# Altium PCB Alarm_Clock_Layout_final.pcbdoc
Units mm, origin at the board's own origin, x right, y up, seen from the top; angles counter-clockwise.
Board outline 100 x 75 mm, 2 copper layers (Top Layer, Bottom Layer), stack 1.071 mm thick; 34 components, 39 nets, 124 pads, 14 vias.
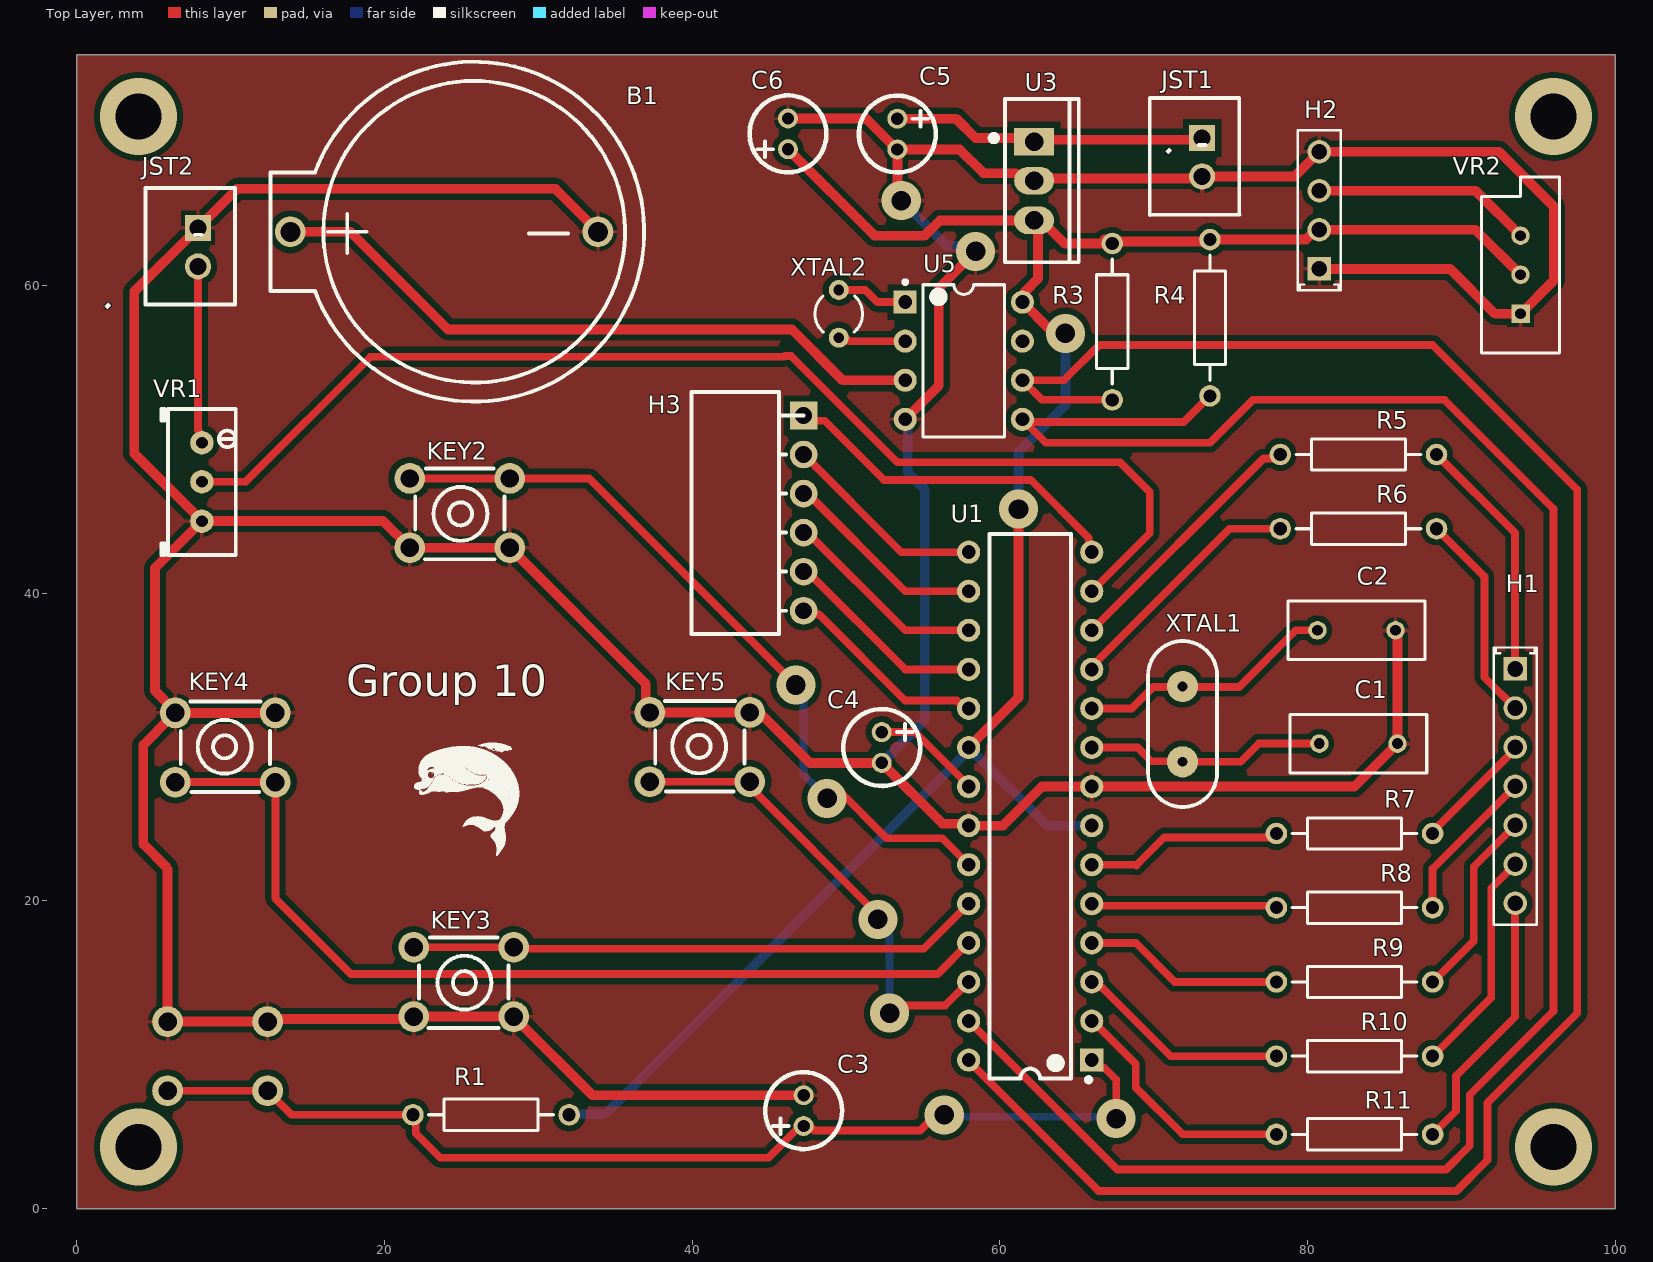
[diagram p0: Top Layer view]
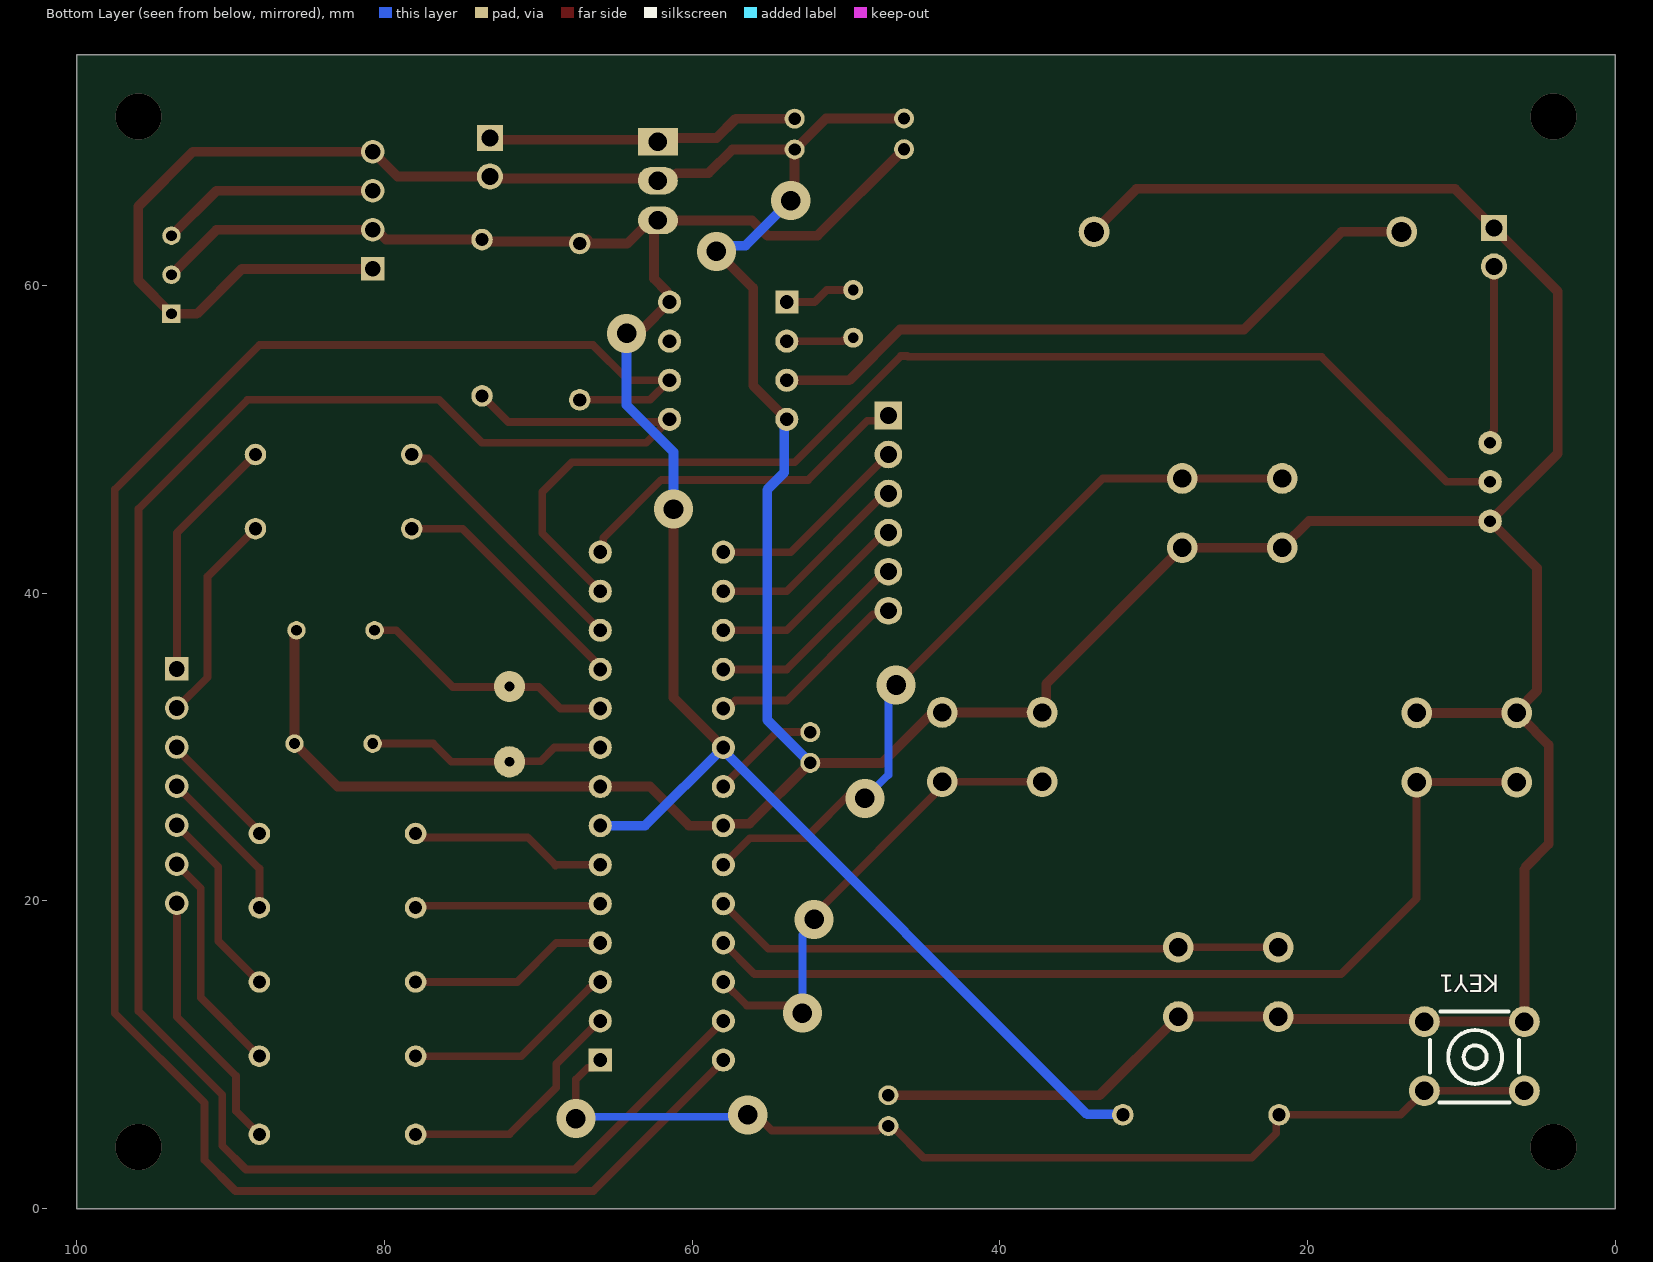
[diagram p1: Bottom Layer view, seen from below]

## Layer stack, top to bottom
Top Solder: solder mask 0.0102, Solder Resist, Dk 3.5
Top Layer: signal copper 0.0356
Dielectric1: dielectric 1, FR-4, Dk 4.8
Bottom Layer: signal copper 0.0356
Bottom Solder: solder mask 0.0102, Solder Resist, Dk 3.5

## Board outline
100,0 0,0 0,75 100,75

## Design rules (kind name [scope] priority, off if disabled: settings)
Clearance [All] p1: gap=0.381 ignorepadtopadclearanceinfootprint=FALSE except(0.254: Arc-THPad Track-THPad SMDPad-THPad THPad-THPad)
ComponentClearance [All] p1 off: gap=0.254 collisioncheckmode=3 verticalgap=0.254 showdistances=FALSE
Height [All] p1: minheight=0 maxheight=30 prefheight=12.7
HoleSize [All] p1: absolutevalues=TRUE maxlimit=10.16 minlimit=0.025 maxpercent=80.000 minpercent=20.000
MinimumSolderMaskSliver [All] p1 off: minsoldermaskwidth=0.127
PolygonConnect [All] p1: connectstyle=Relief reliefconductorwidth=0.254 reliefentries=4 polygonreliefangle="90 Angle" airgapwidth=0.254
RoutingVias [All] p1: holewidth=1.27 width=2.54 viastyle="Through Hole" minholewidth=0.711 minwidth=1.27 maxholewidth=3.81 maxwidth=5.08
SilkToSolderMaskClearance [IsPad] p1 off: minsilkscreentomaskgap=0.254 clearancetoexposedcopper=TRUE
SolderMaskExpansion [All] p1: expansion=0.102 istentingtop=FALSE
Width Width_1 [InNet('+5V') or InNet('GND') or InNet('VCC')] p1: maxlimit=0.762 minlimit=0.635 preferedwidth=0.635 minimp=50.000000 maximp=50.000000 favimp=50.000000
Width [All] p2: maxlimit=0.635 minlimit=0.508 preferedwidth=0.508 minimp=50.000000 maximp=50.000000 favimp=50.000000
25 further rules are at their usual default settings.

## Components (designator, comment, footprint, x,y, rotation, side; value= is the part's Value field where it differs from the comment)
B1 "CR2032 3V" BAT-TH_BS-2-1 23.876,63.5 r90 top
C1 "22pF" RAD-0.2 83.312,30.226 r180 top value=100nF
C2 "22pF" RAD-0.2 83.185,37.592 r180 top value=100nF
C3 "100nF" CAP-TH_BD5.0-P2.00-D0.8-FD 47.244,6.366 r90 top
C4 "100nF" CAP-TH_BD5.0-P2.00-D0.8-FD 52.324,29.972 r270 top
C5 "100nF" CAP-TH_BD5.0-P2.00-D0.8-FD 53.34,69.85 r270 top
C6 "100nF" CAP-TH_BD5.0-P2.00-D0.8-FD 46.228,69.866 r90 top
H1 "KEYPAD" CON7_1X7_P100UM_HDR_TYC 93.5,35.08 r270 top
H2 "LCD_1602" CON4_1X4_P100UM_HDR2_TYC 80.772,61.087 r90 top
H3 "LCD_1602" HDR-TH_6P-P2.54-H-F-W5.7 47.244,45.212 r270 top
JST1 "JST_2 PIN" CONN-TH_XHB-2A 73.152,68.345 r90 top
JST2 "JST_2 PIN" CONN-TH_XHB-2A 7.874,62.503 r90 top
KEY1 "Push_Button" KEY-TH_4P-L6.0-W6.0-P4.50 9.144,9.906 r0 bottom
KEY2 "Push_Button" KEY-TH_4P-L6.0-W6.0-P4.50 24.892,45.212 r180 top
KEY3 "Push_Button" KEY-TH_4P-L6.0-W6.0-P4.50 25.146,14.732 r180 top
KEY4 "Push_Button" KEY-TH_4P-L6.0-W6.0-P4.50 9.652,29.972 r0 top
KEY5 "Push_Button" KEY-TH_4P-L6.0-W6.0-P4.50 40.5,30 r0 top
R1 "RESISTOR" AXIAL-0.4 26.924,6.096 r0 top value=Value
R3 "10k" AXIAL-0.4 67.31,57.658 r90 top value=Value
R4 "10k" AXIAL-0.4 73.66,57.912 r90 top value=Value
R5 "100R" AXIAL-0.4 83.312,49.022 r0 top value=Value
R6 "100R" AXIAL-0.4 83.312,44.196 r0 top value=Value
R7 "100R" AXIAL-0.4 83.058,24.384 r0 top value=Value
R8 "100R" AXIAL-0.4 83.058,19.558 r0 top value=Value
R9 "100R" AXIAL-0.4 83.058,14.732 r0 top value=Value
R10 "100R" AXIAL-0.4 83.058,9.906 r0 top value=Value
R11 "100R" AXIAL-0.4 83.058,4.826 r0 top value=Value
U1 "ATMEGA _328P-PU" DIP-28_L34.6-W7.3-P2.54-LS10.2-BL 61.976,26.162 r90 top
U3 "7805_Regulator" TO-220-3_L10.0-W4.5-P2.54-L 62.23,66.802 r270 top
U5 "DS1307" DIP-8_L9.8-W6.6-P2.54-LS7.6-BL 57.658,55.118 r270 top
VR1 "1k" RES-ADJ-TH_3296W 8.128,47.234 r0 top
VR2 "Potentiometer" VR5 93.853,60.706 r90 top value=1K
XTAL1 "16MHz" "16MHZ_OSC [PCB]" 71.882,31.496 r180 top
XTAL2 "32.768KHz" R38 49.53,58.166 r0 top

## Footprints (in the part's own frame and the unit in brackets; to place one, negate y for a bottom-side part, rotate by r counter-clockwise, add the part's x,y. Pads: shape width x height; smd on the part's side, far side on the other; paste and mask are expansions set on the pad)
"16MHZ_OSC [PCB]" [mil]
  round 80 hole 25: 1(0,96.46) 2(0,-96.46)
  silkscreen extent -89,-212 89,212
AXIAL-0.4 [mm] "Axial Device, Thru-Hole; 2 Leads; 0.4 in Pin Spacing"
  round 1.4 hole 0.85: 1(-5.08,0) 2(5.08,0)
  silkscreen extent -4.06,-1.02 4.06,1.02
BAT-TH_BS-2-1 [mm]
  round 2 hole 1.3: 1(0,10) 2(0,-10)
  silkscreen extent -11.04,-13 11.05,11.3
CAP-TH_BD5.0-P2.00-D0.8-FD [mm]
  round 1.3 hole 0.8: 1(-1,0) 2(1,0)
  silkscreen extent -2.5,-2.5 2.5,2.5
CON4_1X4_P100UM_HDR2_TYC [mil]
  rect 60x60 hole 40 mask+0: 1(0,0)
  round 60 hole 40 mask+0: 2(100,0) 3(200,0) 4(300,0)
  silkscreen extent -55,-55 355,55, body extent 0,0 10,10, height 10
CON7_1X7_P100UM_HDR_TYC [mil]
  rect 60x60 hole 40 mask+0: 1(0,0)
  round 60 hole 40 mask+0: 2(100,0) 3(200,0) 4(300,0) 5(400,0) 6(500,0) 7(600,0)
  silkscreen extent -55,-55 655,55, body extent 0,0 10,10, height 10
CONN-TH_XHB-2A [mm]
  rect 1.7x1.7 hole 1.1: 1(1.251,0)
  round 1.7 hole 1.1: 2(-1.251,0)
  silkscreen extent -3.75,-2.42 3.86,3.4
DIP-8_L9.8-W6.6-P2.54-LS7.6-BL [mm]
  rect 1.5x1.5 hole 0.9: 1(-3.81,-3.81)
  round 1.5 hole 0.9: 2(-1.27,-3.81) 3(1.27,-3.81) 4(3.81,-3.81) 5(3.81,3.81) 6(1.27,3.81) 7(-1.27,3.81) 8(-3.81,3.81)
  silkscreen extent -5.23,-3.93 4.96,2.65
DIP-28_L34.6-W7.3-P2.54-LS10.2-BL [mm]
  rect 1.5x1.5 hole 0.9: 1(-16.51,-4)
  round 1.5 hole 0.9: 2(-13.97,-4) 3(-11.43,-4) 4(-8.89,-4) 5(-6.35,-4) 6(-3.81,-4) 7(-1.27,-4) 8(1.27,-4) 9(3.81,-4) 10(6.35,-4) 11(8.89,-4) 12(11.43,-4) 13(13.97,-4) 14(16.51,-4) 15(16.51,4) 16(13.97,4) 17(11.43,4) 18(8.89,4) 19(6.35,4) 20(3.81,4) 21(1.27,4) 22(-1.27,4) 23(-3.81,4) 24(-6.35,4) 25(-8.89,4) 26(-11.43,4) 27(-13.97,4) 28(-16.51,4)
  silkscreen extent -17.94,-3.95 17.7,2.65
HDR-TH_6P-P2.54-H-F-W5.7 [mm]
  rect 1.8x1.8 hole 1.1: 1(-6.35,0)
  round 1.8 hole 1.1: 2(-3.81,0) 3(-1.27,0) 4(1.27,0) 5(3.81,0) 6(6.35,0)
  silkscreen extent -7.87,-7.3 7.87,0
KEY-TH_4P-L6.0-W6.0-P4.50 [mm]
  round 2 hole 1.2: 1(-3.25,-2.25) 2(3.25,-2.25) 3(3.25,2.25) 4(-3.25,2.25)
  silkscreen extent -2.9,-2.9 2.9,3
R38 [mm] "Crystal, Thru-Hole; 2 Leads; Body 3.1 x 8.2 mm (Dia.xH)"
  round 1.3 hole 0.7: 1(0,1.55) 2(0,-1.55)
  silkscreen extent -1.55,-1.19 1.55,1.17
RAD-0.2 [mm] "Radial Cap, Thru-Hole; 2 Leads; 0.2 in Pin Spacing"
  round 1.2 hole 0.7: 1(-2.54,0) 2(2.54,0)
  silkscreen extent -4.44,-1.91 4.44,1.91
RES-ADJ-TH_3296W [mil]
  round 60 hole 30: 1(0,100.39) 2(0,0.39) 3(0,-100.4)
  silkscreen extent -104,-187 87,187
TO-220-3_L10.0-W4.5-P2.54-L [mm]
  rect 1.8x2.6 hole 1.2: 1(-2.56,0.005)
  oval 1.8x2.6 hole 1.2: 2(-0.02,0.005) 3(2.56,-0.005)
  silkscreen extent -5.32,-2.82 5.28,2.9
VR5 [mm] "Thru-Hole; 3 Leads"
  rect 1.2x1.2 hole 0.7: 1(-2.54,0)
  round 1.2 hole 0.7: 2(0,0) 3(2.54,0)
  silkscreen extent -5.08,-2.54 6.35,2.54

## Part data
B1: BOM_JLCPCB Part Class="Extended Part", BOM_Manufacturer=Q&J, BOM_Manufacturer Part=BS-2-1, BOM_Supplier=LCSC, BOM_Supplier Part=C70376, spicePre=B, spiceSymbolName=CR2032-BS-2-1
C1 C2: library part 100nF, BOM_Manufacturer=LCSC, BOM_Manufacturer Part="0.1UF(104) +-20% 63v", BOM_Supplier=LCSC, BOM_Supplier Part=C19355, spicePre=C, spiceSymbolName=100nF
C3 C4 C5 C6: BOM_JLCPCB Part Class="Extended Part", BOM_Manufacturer=ValuePro, BOM_Manufacturer Part="0.1UF 50V", BOM_Supplier=LCSC, BOM_Supplier Part=C28061, nameAlias=Capacitance, spicePre=C, spiceSymbolName=0.1uF
H1: library part 826926-7, "No Description Available", Mfr_Name="TE Connectivity", Copyright="Copyright (C) 2021 Ultra Librarian. All rights reserved.", Manufacturer_Part_Number=826926-7, RefDes=RefDes, Type=DEV
H2: library part 826936-4, "No Description Available", Mfr_Name="TE Connectivity", Copyright="Copyright (C) 2021 Ultra Librarian. All rights reserved.", Manufacturer_Part_Number=826936-4, RefDes=RefDes, Type=DEV
H3: BOM_Manufacturer=TXGA(特思嘉), BOM_Manufacturer Part=FFH25402-S06B1001K6K, BOM_Supplier=LCSC, BOM_Supplier Part=C2833720, Contributor=LCSC, spicePre=H, spiceSymbolName=FFH25402-S06B1001K6K
JST1 JST2: BOM_JLCPCB Part Class="Extended Part", BOM_Manufacturer=BOOMELE, BOM_Manufacturer Part="XHB-2A Connector", BOM_Supplier=LCSC, BOM_Supplier Part=C57981, image=//image.lceda.cn/szlcsc/C57981.jpg, spicePre=C, spiceSymbolName="JST_2 PIN"
KEY1 KEY2 KEY3 KEY4 KEY5: BOM_Manufacturer=ReliaPro, BOM_Manufacturer Part=button6*6*8.5, BOM_Supplier=LCSC, BOM_Supplier Part=C59980, image=http://image.lceda.cn/szlcsc/C59980.jpg, spicePre=K, spiceSymbolName=Push_Button
R1 R3 R4 R5 R6 R7 R8 R9 R10 R11: BOM_Manufacturer=UniOhm, BOM_Manufacturer Part=MFR0W4F2200A50, Power=1/4W, Tolerance=±1%, BOM_EasyEDA=E57439, BOM_Supplier=EasyEDA, BOM_Supplier Part=E57439, spicePre=R, spiceSymbolName=RESISTOR
U1: BOM_Manufacturer=MICROCHIP, BOM_Manufacturer Part=ATMEGA328P-PU, BOM_Supplier=LCSC, BOM_Supplier Part=C33901, Contributor=LCSC, image=//image.lceda.cn/szlcsc/C33901.jpg, sourceId=Oic6oiASL, spicePre=U, spiceSymbolName="ATMEGA _328P-PU", timeStamp=1451725987
U3: BOM_JLCPCB Part Class="Extended Part", BOM_Manufacturer="Foshan Blue Rocket Elec", BOM_Manufacturer Part=7805, BOM_Supplier=LCSC, BOM_Supplier Part=C305416, Contributor=LCSC, spicePre=U, spiceSymbolName=7805_Regulator
U5: BOM_JLCPCB Part Class="Extended Part", BOM_Manufacturer=MAXIM, BOM_Manufacturer Part=DS1307+, BOM_Supplier=LCSC, BOM_Supplier Part=C59267, spicePre=U, spiceSymbolName=DS1307+
VR1: BOM_Manufacturer=ReliaPro, BOM_Manufacturer Part=Pot-100R, BOM_Supplier=LCSC, BOM_Supplier Part=C13649, nameAlias=Resistance(Ohms), spicePre=V, spiceSymbolName=Pot-100R
VR2: library part RPot, LatestRevisionDate=17-Jul-2002, LatestRevisionNote="Re-released for DXP Platform.", PackageDescription="Variable Resistor, Thru-Hole; 3 Leads", PackageReference=VR5, Published=8-Jun-2000, Publisher="Altium Limited", Set Position=0.5, Sim Note="Enter the Resistance value and the set point into parameter fields."
XTAL1: BOM_Manufacturer=SHIVRAM, BOM_Manufacturer Part=0SC-16MHz, BOM_Supplier=SHIVRAM, BOM_Supplier Part=0SC-16MHz, Contributor="Mantas Petrauskas", nameAlias=Frequency, spicePre=X, spiceSymbolName="Crystal Oscillator"
XTAL2: library part XTAL, "Crystal Oscillator", LatestRevisionDate=17-Jul-2002, LatestRevisionNote="Re-released for DXP Platform.", PackageDescription="Crystal, Thru-Hole; 2 Leads; Body 3.1 x 8.2 mm (Dia.xH)", PackageReference=R38, Published=8-Jun-2000, Publisher="Altium Limited"

## Via types
v1: diameter 2.54, hole 1.27, Top Layer to Bottom Layer, 10 vias
v2: diameter 5/3 (per signal layer), hole 3, Top Layer to Bottom Layer, 4 vias

## Nets (pads, with @x,y where several pads share a name; then routed paths per layer and width w, separated by ;. In a path a pad name is that pad's centre, name@x,y a point inside that pad or via, vN(x,y) a via of type N, cw(c..) or ccw(c..) an arc to the next point about the centre after c; other vN are vias at no path point)
1: R5.1 U1.12 | length 17
  Top Layer w0.508: U1.12 77.144,48.76 77.97,48.76 R5.1
2: R6.1 U1.11 | length 15.9
  Top Layer w0.508: U1.11 65.976,35.242 74.93,44.196 R6.1@77.978,44.196
3: R7.1 U1.6 | length 12.9
  Top Layer w0.508: U1.6 68.834,22.352 68.878,22.308 70.699,24.13 77.724,24.13 R7.1
+5V: C6.1 H2.2 R1.2 R3.2 R4.2 U1.7 U1.20 U3.3 U5.8 VR2.2 | length 137.2
  Top Layer w0.635: C6.1@46.228,68.834 46.26,68.834 51.848,63.246 55.118,63.246 56.114,64.242 U3.3 ; U1.20 61.214,33.21 61.214,44.45 61.096,44.568 61.096,45.348 v1(61.214,45.466) ; U5.8 61.634,59.094 61.634,59.602 62.484,60.452 62.484,63.983 U3.3 ; U5.8@61.634,58.762 63.135,57.261 63.897,57.261 v1(64.262,56.896) ; R3.2@66.802,62.992 66.802,62.805 66.735,62.738 64.217,62.738 62.713,64.242 U3.3 ; R3.2 67.437,62.865 73.533,62.865 R4.2 R4.2@73.787,62.992 ; R4.2@73.867,62.992 R4.2@73.787,62.992 ; H2.2@80.76,63.754 H2.2@80.899,63.754 ; VR2.2 90.932,63.627 H2.2 80.531,63.627 79.896,62.992 R4.2@73.787,62.992
  Bottom Layer w0.635: R1.2 32.034,6.126 34.32,6.126 57.976,29.782 U1.20 63.056,24.892 U1.7@65.786,24.892 ; v1(61.214,45.466) 61.214,49.185 64.262,52.233 v1(64.262,56.896)
A: R8.1 U1.5 | length 11.9
  Top Layer w0.508: U1.5 66.103,19.685 77.597,19.685 R8.1@77.724,19.812
B: R9.1 U1.4 | length 13.1
  Top Layer w0.508: U1.4 68.834,17.272 71.374,14.732 R9.1
BACK: KEY5.1 KEY5.2 U1.26 | length 31.7
  Top Layer w0.508: KEY5.1@37.338,27.686 37.402,27.75 KEY5.2 ; KEY5.2@43.942,28.194 43.942,27.241 51.879,19.304 52.07,19.304 v1(52.07,18.796) ; v1(52.832,12.7) 53.086,12.7 53.594,13.208 56.452,13.208 U1.26
  Bottom Layer w0.508: v1(52.07,18.796) 52.07,18.542 52.832,17.78 v1(52.832,12.7)
C: R10.1 U1.3 | length 13.9
  Top Layer w0.508: U1.3 66.244,14.732 66.647,14.33 66.696,14.33 71.12,9.906 77.47,9.906 R10.1@77.724,10.16
D: R11.1 U1.2 | length 15.9
  Top Layer w0.508: U1.2 66.04,12.192 68.834,9.398 68.834,7.874 71.882,4.826 R11.1
D4: H3.3 U1.16 | length 13.4
  Top Layer w0.508: H3.3 47.498,46.482 53.848,40.132 U1.16
D5: H3.4 U1.17 | length 13.4
  Top Layer w0.508: H3.4 47.498,43.942 53.848,37.592 U1.17
D6: H3.5 U1.18 | length 13.4
  Top Layer w0.508: H3.5 47.498,41.402 53.848,35.052 U1.18
D7: H3.6 U1.19 | length 13.4
  Top Layer w0.508: H3.6 47.491,38.615 48.253,38.615 53.848,33.02 57.2,33.02 57.708,32.512 U1.19
DOWN: KEY3.1 KEY3.2 U1.24 | length 37.4
  Top Layer w0.508: KEY3.2@21.844,17.018 21.88,16.982 KEY3.2 KEY3.1 ; KEY3.1@28.396,16.891 55.055,16.891 U1.24
E: H3.2 U1.15 | length 13.4
  Top Layer w0.508: H3.2 53.594,42.672 U1.15
GND: B1.2 C1.1 C2.1 C3.2 C4.2 C5.2 C6.2 H2.1 H2.4 JST1.2 JST2.1 KEY1.1 KEY1.2 KEY2.3 KEY2.4 KEY3.3 KEY3.4 KEY4.3 KEY4.4 KEY5.3 KEY5.4 U1.8 U1.22 U3.2 U5.4 VR1.3 VR2.1 | length 355.4
  Top Layer w0.635: 5.842,22.098 5.894,22.046 KEY1.1 KEY1.2 KEY1.2@12.394,12.525 ; 5.842,22.162 4.318,23.686 4.318,30.138 6.096,31.916 KEY4.4@6.096,32.512 ; KEY4.4@6.35,32.258 6.35,32.391 5.08,33.661 5.08,41.636 VR1.3 ; KEY4.4 12.736,32.222 KEY4.3@12.954,32.004 ; KEY1.2@12.446,12.192 12.573,12.319 KEY3.3@21.733,12.319 ; KEY2.3@21.59,42.926 21.626,42.962 KEY2.3 ; KEY3.3@21.635,12.221 KEY3.3@21.733,12.319 ; KEY3.4@28.396,12.192 28.686,12.192 33.512,7.366 C3.2 ; KEY3.4 KEY3.3 21.88,12.482 21.844,12.446 21.86,12.446 KEY3.3@21.733,12.319 ; B1.2@33.909,63.5 31.115,66.294 10.414,66.294 JST2.1 3.731,59.611 3.731,49.081 VR1.3 ; KEY5.4 43.68,32.25 KEY5.3@43.688,32.258 ; KEY5.4@37.338,31.75 36.989,32.099 36.989,34.115 KEY2.4 KEY2.3 ; KEY5.3@44.196,32.434 47.658,28.972 C4.2 ; C6.2@46.048,70.866 C6.2 51.308,70.866 C5.2@53.086,69.088 ; C4.2@52.324,29.152 C4.2 ; C5.2@53.34,68.834 53.34,65.786 v1(53.594,65.532) ; C5.2 57.388,68.85 58.928,67.31 61.032,67.31 61.297,67.045 61.711,67.045 U3.2@61.976,67.31 ; U5.4 56.035,53.495 56.035,59.845 v1(58.42,62.23) ; U1.22@57.576,25.022 56.274,25.022 C4.2 ; U1.22 60.198,24.892 62.738,27.432 U1.8@65.786,27.432 ; U3.2 62.371,66.958 72.996,66.958 JST1.2@73.152,66.802 ; U1.8 83.058,27.432 C1.1 85.852,37.312 85.725,37.439 C2.1@85.725,37.465 ; JST1.2@73.025,67.183 73.114,67.094 JST1.2 79.159,67.094 H2.4 ; JST1.2@73.152,67.056 JST1.2@73.279,66.929 ; H2.1 89.281,61.087 92.202,58.166 VR2.1 96.012,60.325 96.012,65.151 92.456,68.707 H2.4@80.899,68.707 ; VR1.3 8.148,44.704 19.9,44.704 KEY2.3
  Bottom Layer w0.635: C4.2 55.118,31.766 55.118,46.736 54.014,47.84 U5.4@54.014,51.22 ; v1(53.594,65.532) 56.531,62.595 58.055,62.595 v1(58.42,62.23)
NetB1_1: B1.1 U5.3 | length 44
  Top Layer w0.635: B1.1 17.78,63.5 24.13,57.15 46.482,57.15 49.784,53.848 U5.3
NetC1_2: C1.2 U1.9 XTAL1.1 | length 15.8
  Top Layer w0.508: U1.9 68.961,29.972 69.85,29.083 XTAL1.1@71.882,29.083 ; XTAL1.1@71.972,28.956 XTAL1.1 75.655,29.046 76.835,30.226 C1.2
NetC2_2: C2.2 U1.10 XTAL1.2 | length 16.8
  Top Layer w0.508: U1.10 68.58,32.512 69.977,33.909 75.565,33.909 79.248,37.592 C2.2
NetC3_1: C3.1 KEY1.3 KEY1.4 R1.1 U1.1 | length 70.4
  Top Layer w0.508: KEY1.4@5.842,7.62 5.878,7.656 KEY1.4 KEY1.3 KEY1.3@12.446,7.604 ; KEY1.3@12.446,7.62 KEY1.3@12.446,7.604 ; C3.1 47.396,5.214 47.803,5.214 47.938,5.08 54.822,5.08 55.838,6.096 v1(56.388,6.096) ; C3.1@47.244,5.58 46.878,5.214 46.87,5.214 44.958,3.302 23.622,3.302 22.031,4.893 22.031,5.909 R1.1 13.954,6.096 KEY1.3@12.446,7.604 ; U1.1 66.472,9.156 66.79,9.156 67.564,8.382 v1(67.564,5.842)
  Bottom Layer w0.508: v1(56.388,6.096) 56.515,5.969 67.437,5.969 v1(67.564,5.842)
NetC4_1: C4.1 U1.21 | length 7.2
  Top Layer w0.508: C4.1 54.499,30.972 57.976,27.495 U1.21
NetH1_1: H1.1 R5.2 | length 16.1
  Top Layer w0.508: R5.2 93.5,43.914 H1.1 H1.1@93.5,35
NetH1_2: H1.2 R6.2 | length 13.8
  Top Layer w0.508: R6.2 91.5,41.088 91.5,34.54 H1.2 H1.2@93.5,32.5
NetH1_3: H1.3 R7.2 | length 7.8
  Top Layer w0.508: R7.2 88.138,24.511 93.472,29.845 H1.3@93.472,29.972
NetH1_4: H1.4 R8.2 | length 10.1
  Top Layer w0.508: R8.2 88.138,22.098 H1.4@93.472,27.432
NetH1_5: H1.5 R9.2 | length 12.4
  Top Layer w0.508: R9.2 90.805,17.399 90.805,22.225 H1.5@93.472,24.892
NetH1_6: H1.6 R10.2 | length 14.7
  Top Layer w0.508: R10.2 91.948,13.716 91.948,20.828 H1.6@93.472,22.352
NetH1_7: H1.7 R11.2 | length 17.2
  Top Layer w0.508: R11.2 89.662,6.35 89.662,8.636 93.5,12.474 93.5,19.784 H1.7@93.472,19.812
NetH2_3: H2.3 VR2.3 | length 14.3
  Top Layer w0.635: H2.3 90.932,66.167 VR2.3
NetJST2_2: JST2.2 VR1.1 | length 11.6
  Top Layer w0.508: JST2.2 7.874,50.59 7.934,50.53 7.934,49.978 VR1.1
NetU5_1: U5.1 XTAL2.1 | length 4.4
  Top Layer w0.508: XTAL2.1 51.256,59.716 52.044,58.928 U5.1@53.594,58.928
NetU5_2: U5.2 XTAL2.2 | length 4.2
  Top Layer w0.508: XTAL2.2 49.682,56.464 50.147,56.464 50.224,56.388 U5.2@53.594,56.388
OK: KEY4.1 KEY4.2 U1.25 | length 62.1
  Top Layer w0.508: KEY4.1@6.35,27.686 6.386,27.722 KEY4.1 KEY4.2 12.902,24.69 12.902,20.162 17.824,15.24 55.944,15.24 U1.25
RS: H3.1 U1.14 | length 22.8
  Top Layer w0.508: H3.1 47.592,51.214 48.608,51.214 52.451,47.371 62.003,47.371 65.786,43.588 65.786,42.862 U1.14
SCL: R3.1 U1.28 U5.6 | length 131.3
  Top Layer w0.508: U1.28 57.976,9.588 66.421,1.143 89.687,1.143 91.694,3.15 91.694,6.858 97.536,12.7 97.536,13.716 ; R3.1 62.738,52.578 U5.6 64.162,53.848 66.448,56.134 88.138,56.134 97.536,46.736 97.536,13.843
SDA: R4.1 U1.27 U5.5 | length 132.8
  Top Layer w0.508: U1.27 67.628,2.54 89.002,2.54 90.551,4.089 90.551,7.391 95.987,12.827 95.987,45.491 88.9,52.578 76.454,52.578 73.66,49.784 62.992,49.784 U5.5 ; U5.5@61.646,51.13 71.958,51.13 R4.1
SPEAKER: U1.13 VR1.2 | length 76.5
  Top Layer w0.508: VR1.2 10.966,47.244 19.094,55.372 45.974,55.372 46.018,55.416 46.438,55.416 53.34,48.514 67.818,48.514 69.75,46.582 69.75,43.906 66.294,40.45 U1.13@66.294,40.132
UP: KEY2.1 KEY2.2 U1.23 | length 50.5
  Top Layer w0.508: KEY2.2@21.59,47.498 21.626,47.462 KEY2.2 KEY2.1 ; KEY2.1@28.194,47.752 28.484,47.462 33.31,47.462 v1(46.736,34.036) ; v1(48.768,26.67) 49.32,27.222 49.486,27.222 52.638,24.07 56.258,24.07 U1.23
  Bottom Layer w0.508: v1(46.736,34.036) 46.736,33.484 47.244,32.976 47.244,28.194 v1(48.768,26.67)
VCC: C5.1 JST1.1 U3.1 | length 20
  Top Layer w0.635: C5.1 57.166,70.85 58.42,69.596 61.722,69.596 U3.1@61.976,69.85 ; U3.1 62.352,69.479 72.761,69.479 JST1.1@72.898,69.342
pads on no net: U5.7
copper on no net:
  other v2: 4,4 96,4 4,71 96,71

## Polygon pours and split planes (outlines as drawn)
GND on Top Layer "GND_L01_P000" (solid, remove dead copper, pour order 0): 0,75 100,75 100,0 0,0

## Silkscreen, mask and mechanical layers (free items; w line width, h text height)
Top Overlay:
  drawing of 5 lines, arcs and shapes, not listed
  text "Group 10" at 17.526,33.316 h2.03
Document:
  lines w0.15: 0,0 0,5 ; 9.5,30 9.5,30 ; 40.5,30 40.5,30
  lines w0.25: 0,30 0.028,29.972